# Altium PCB SpaceVNX.PcbDoc (part 1 of 2)
Units mm, origin at the board's own origin, x right, y up, seen from the top; angles counter-clockwise.
Board outline 73 x 84 mm, 6 copper layers (Top Layer, Int1 (GND), Int2 (Sign), Int3 (Sign), Int4 (PWR), Bottom Layer), stack 1.552 mm thick; 68 components, 82 nets, 1011 pads, 708 vias.
Unrouted connection lines stored in the file: 280.
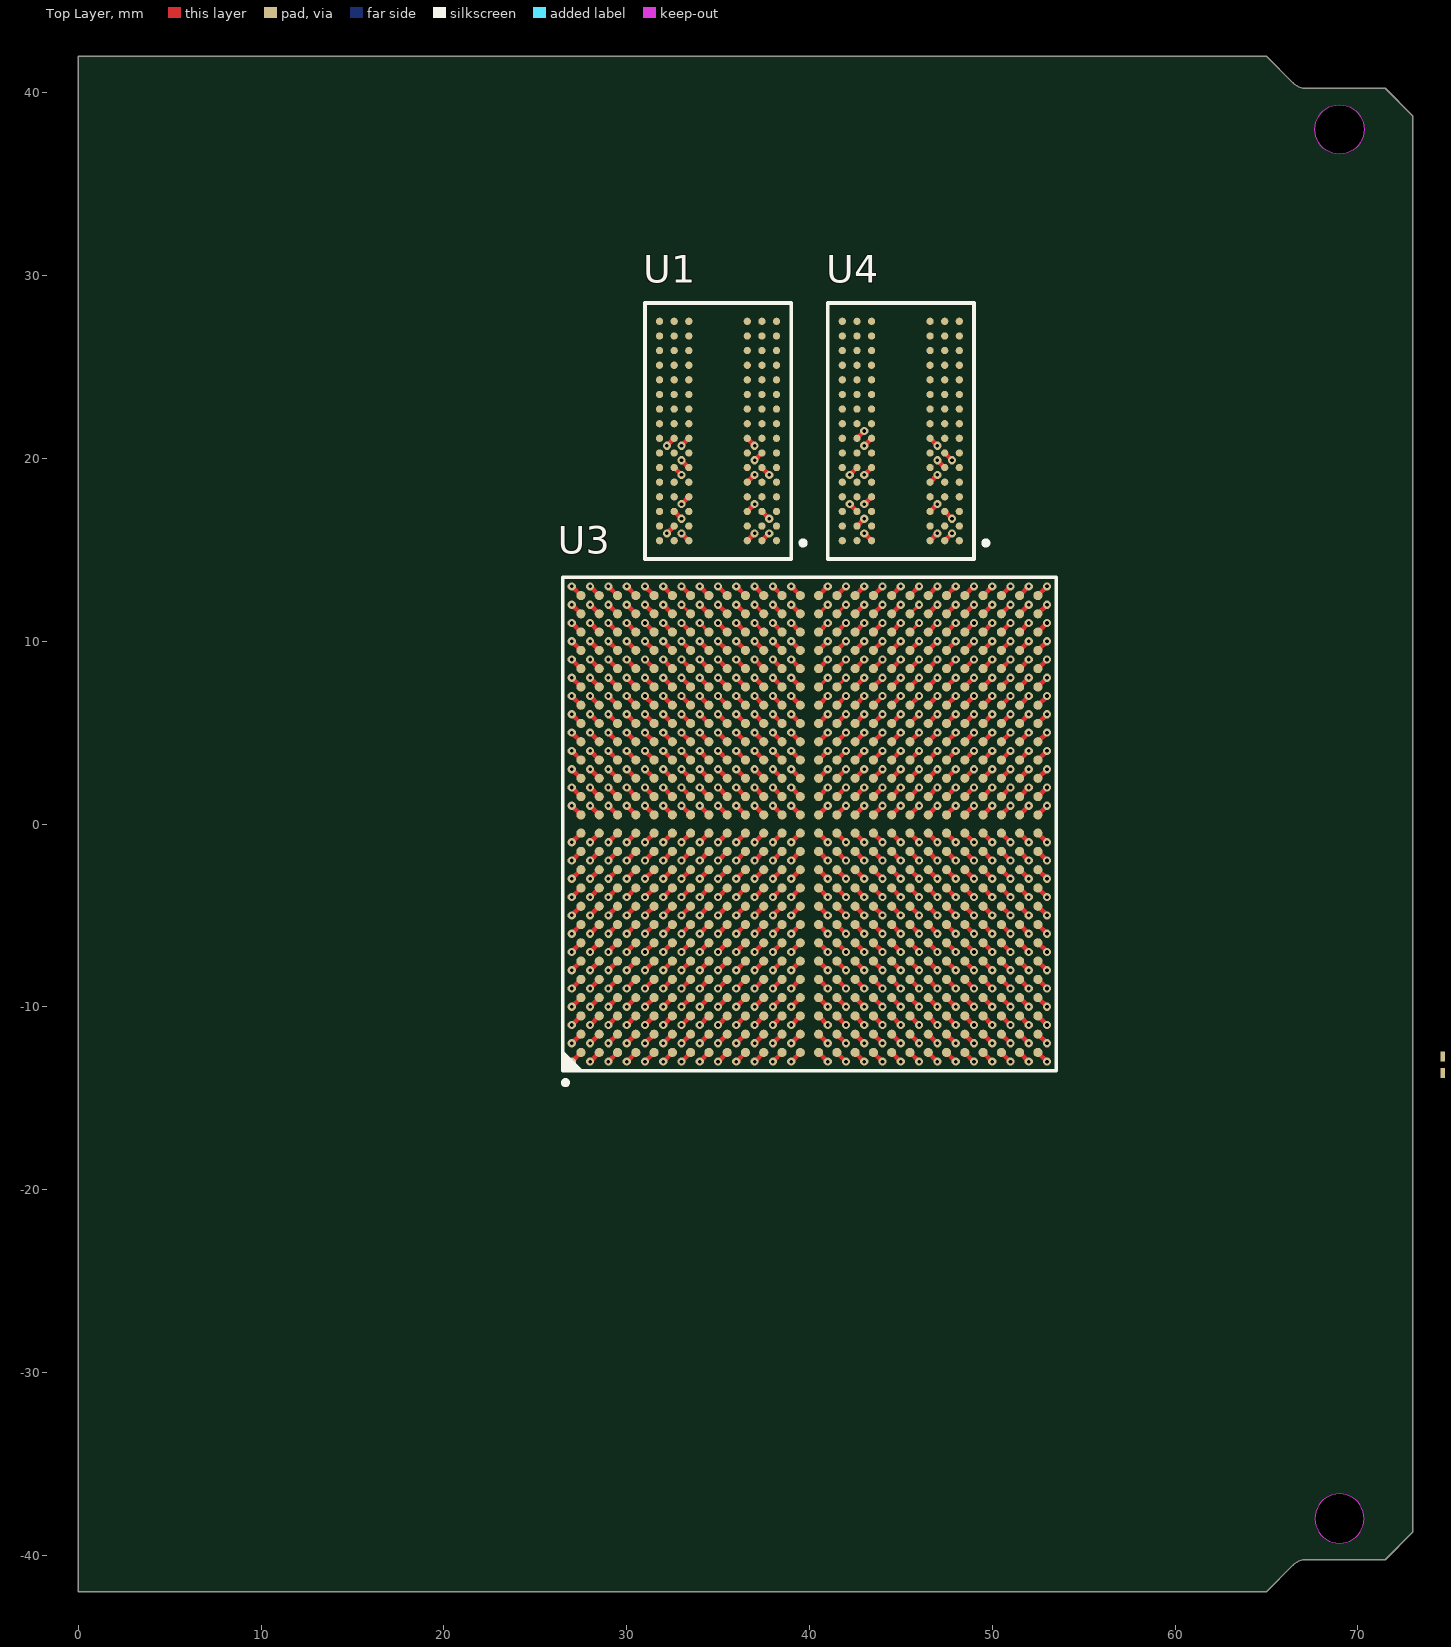
[diagram p0: Top Layer view]
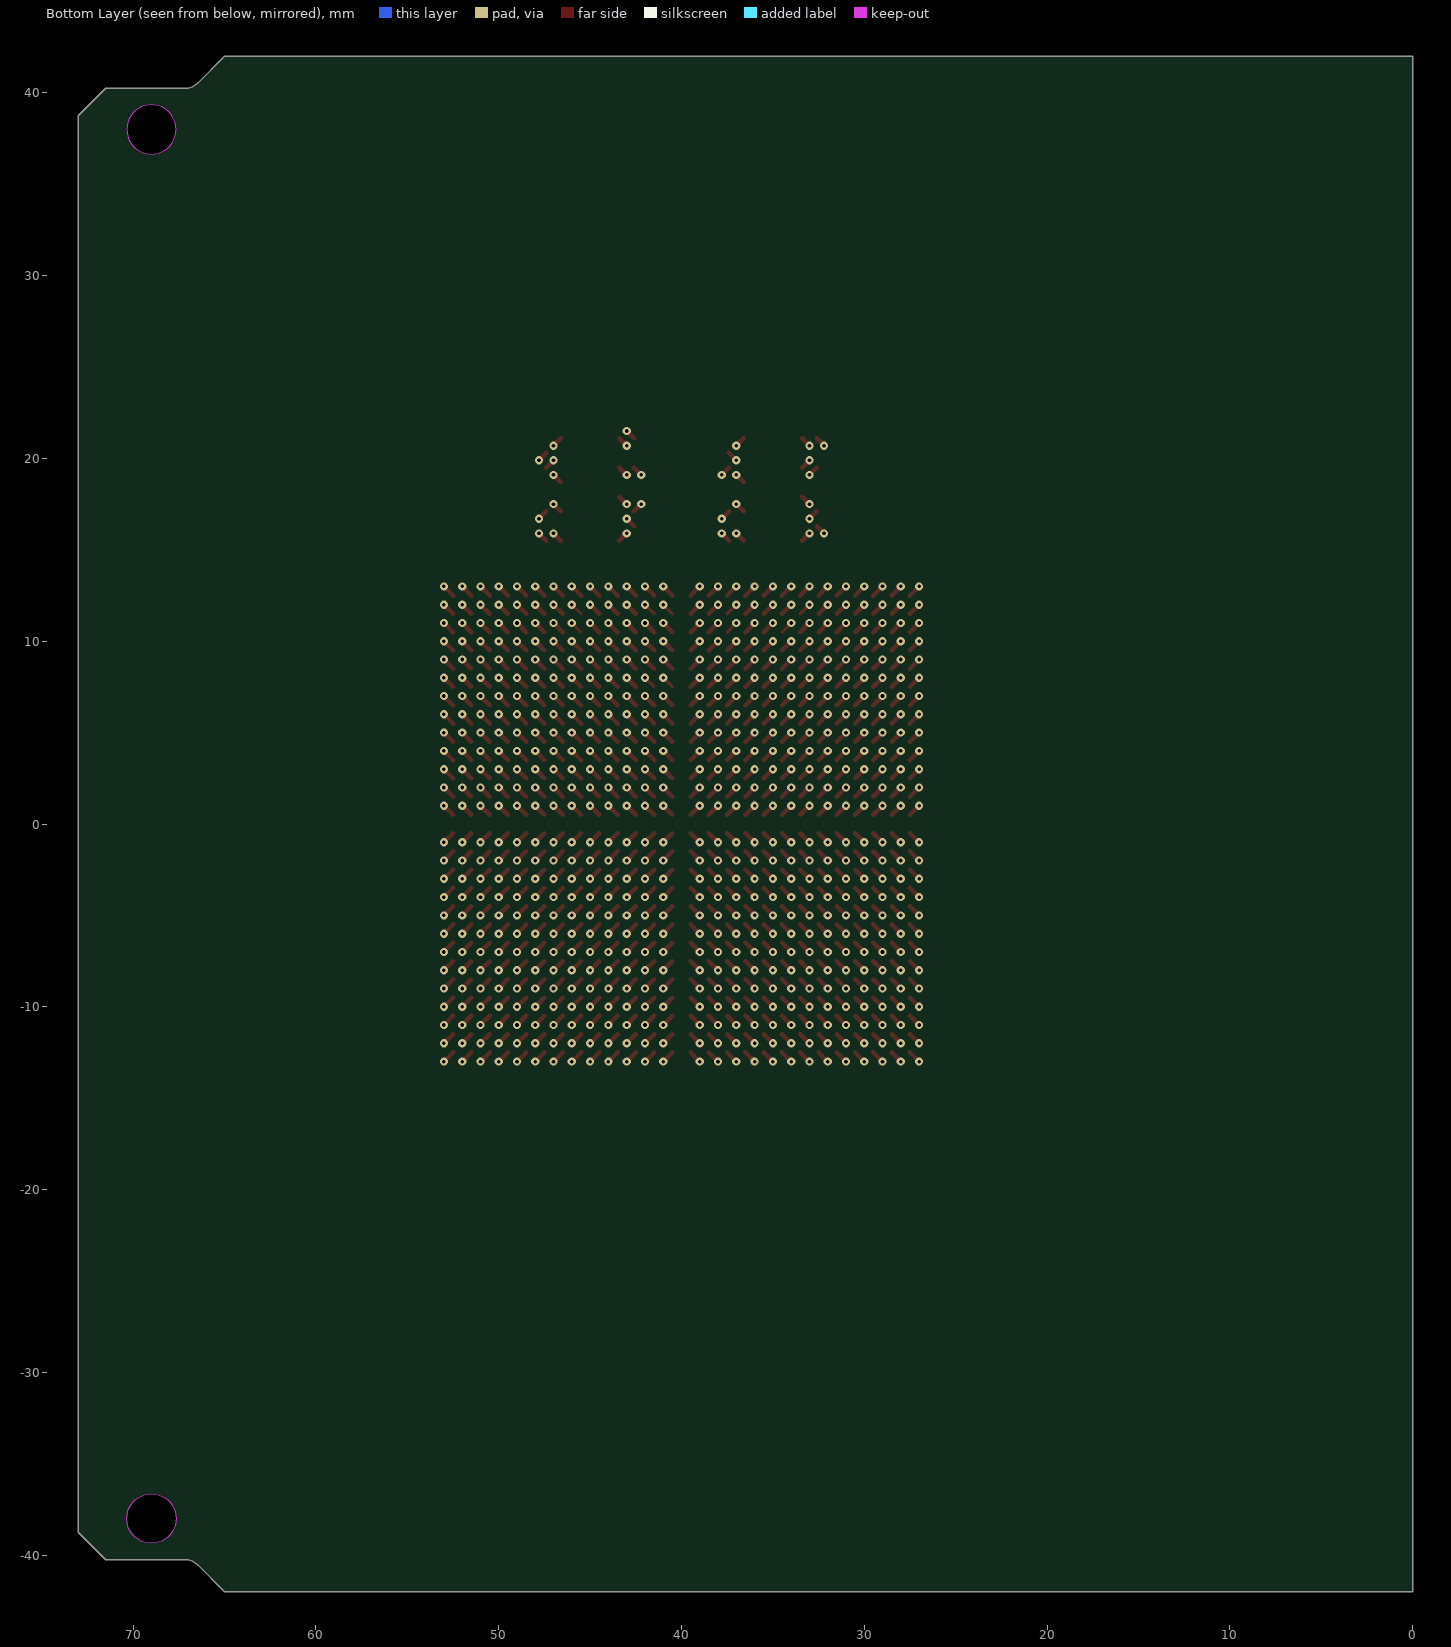
[diagram p1: Bottom Layer view, seen from below]
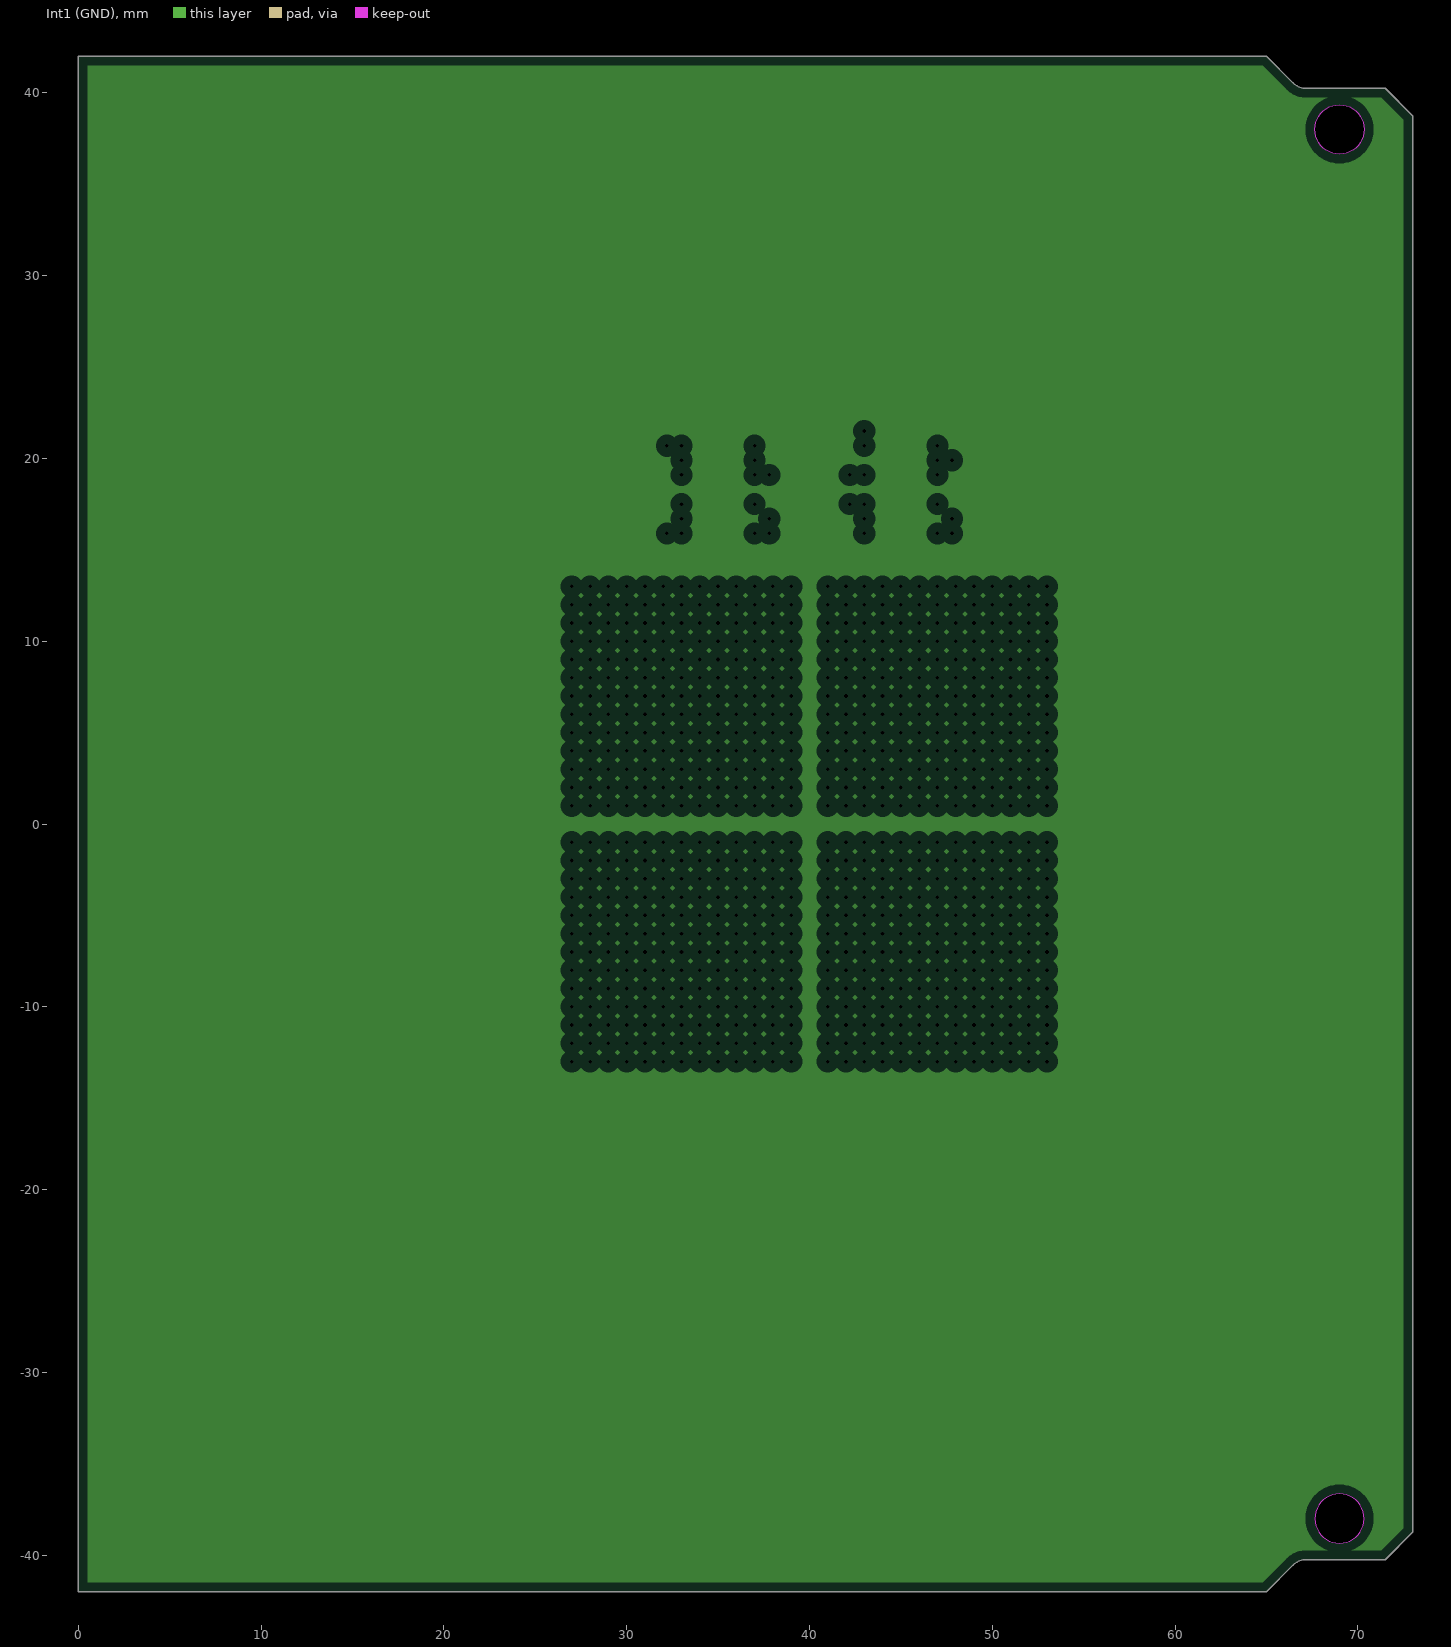
[diagram p2: Int1 (GND), clearances drawn from the general rule]
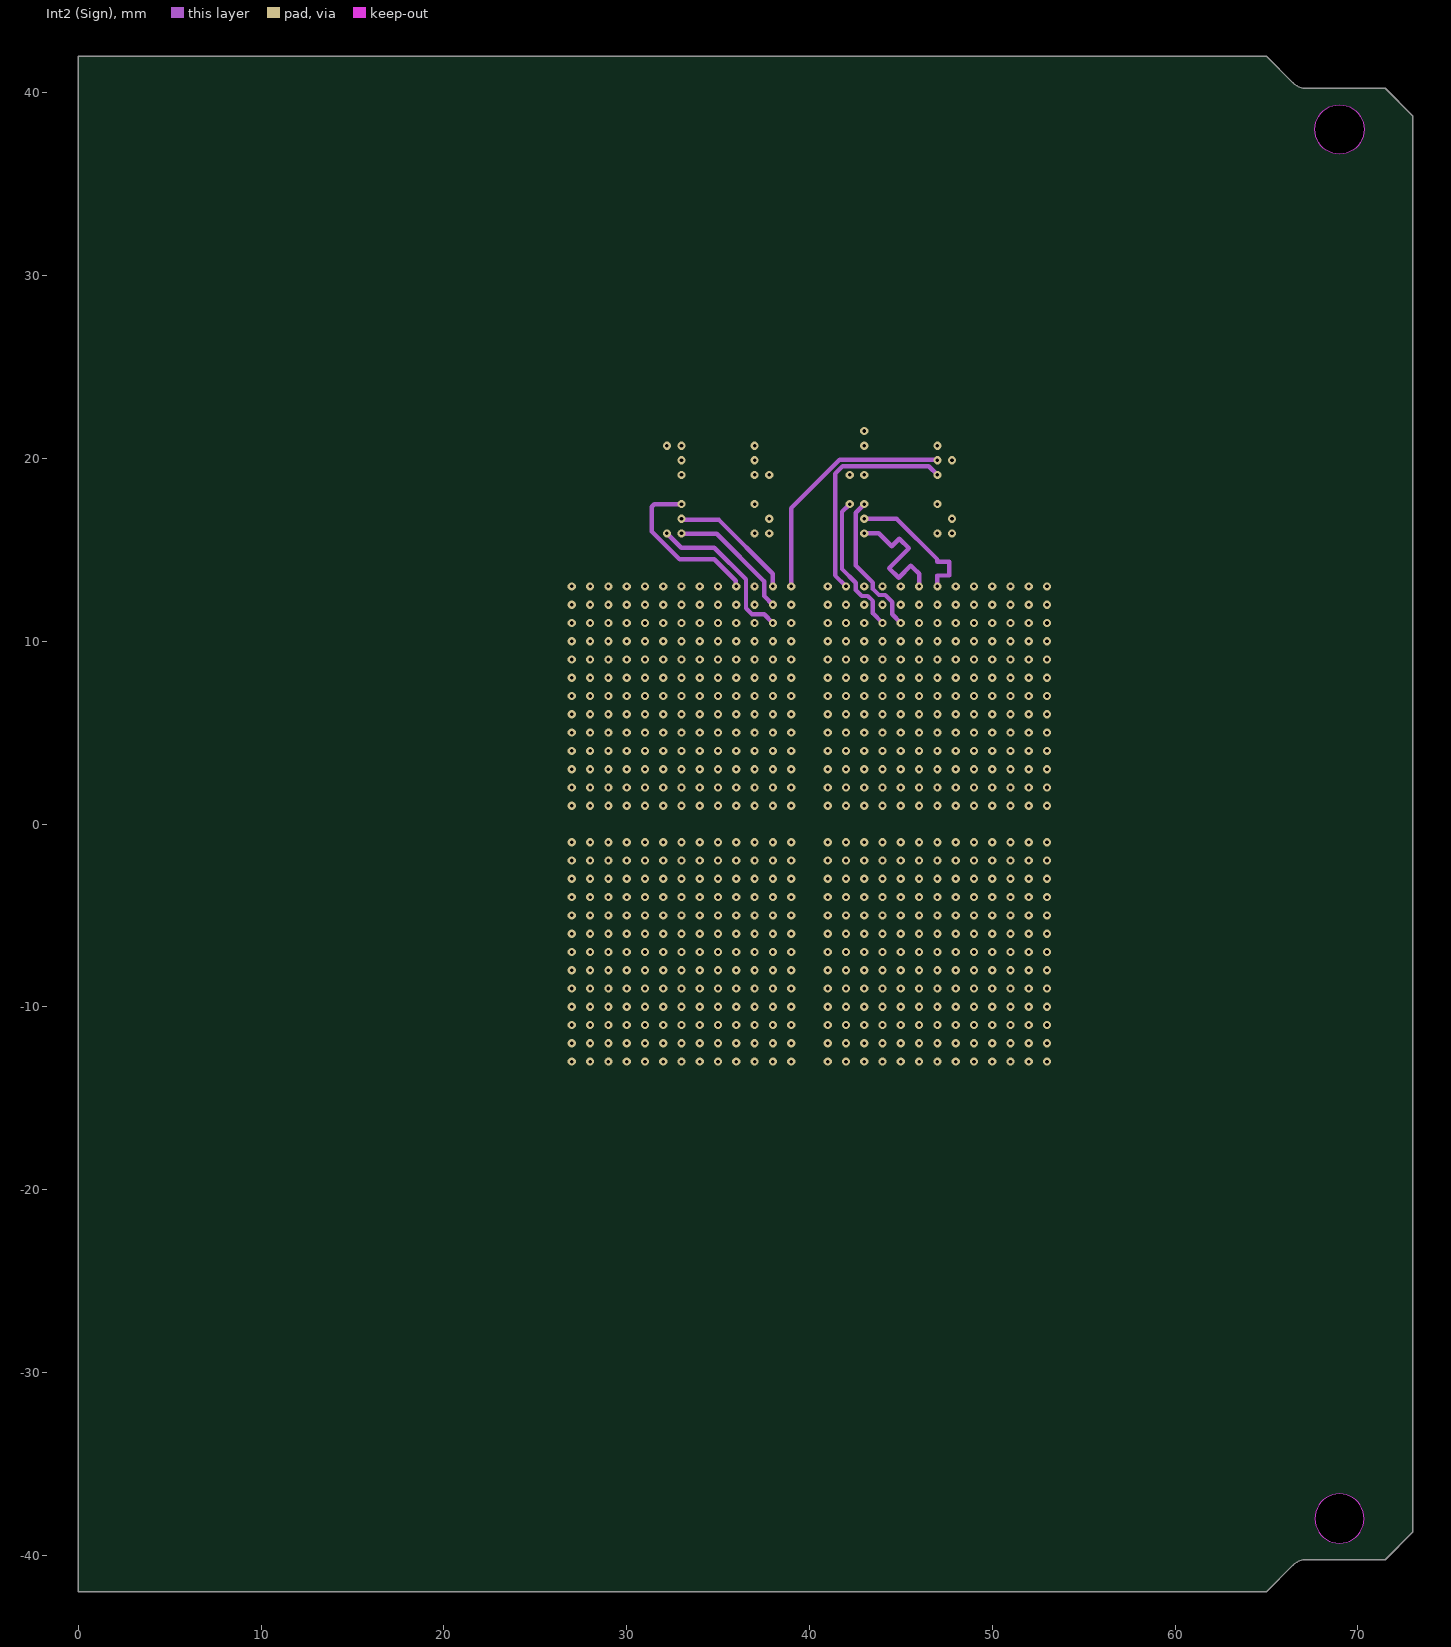
[diagram p3: Int2 (Sign)]
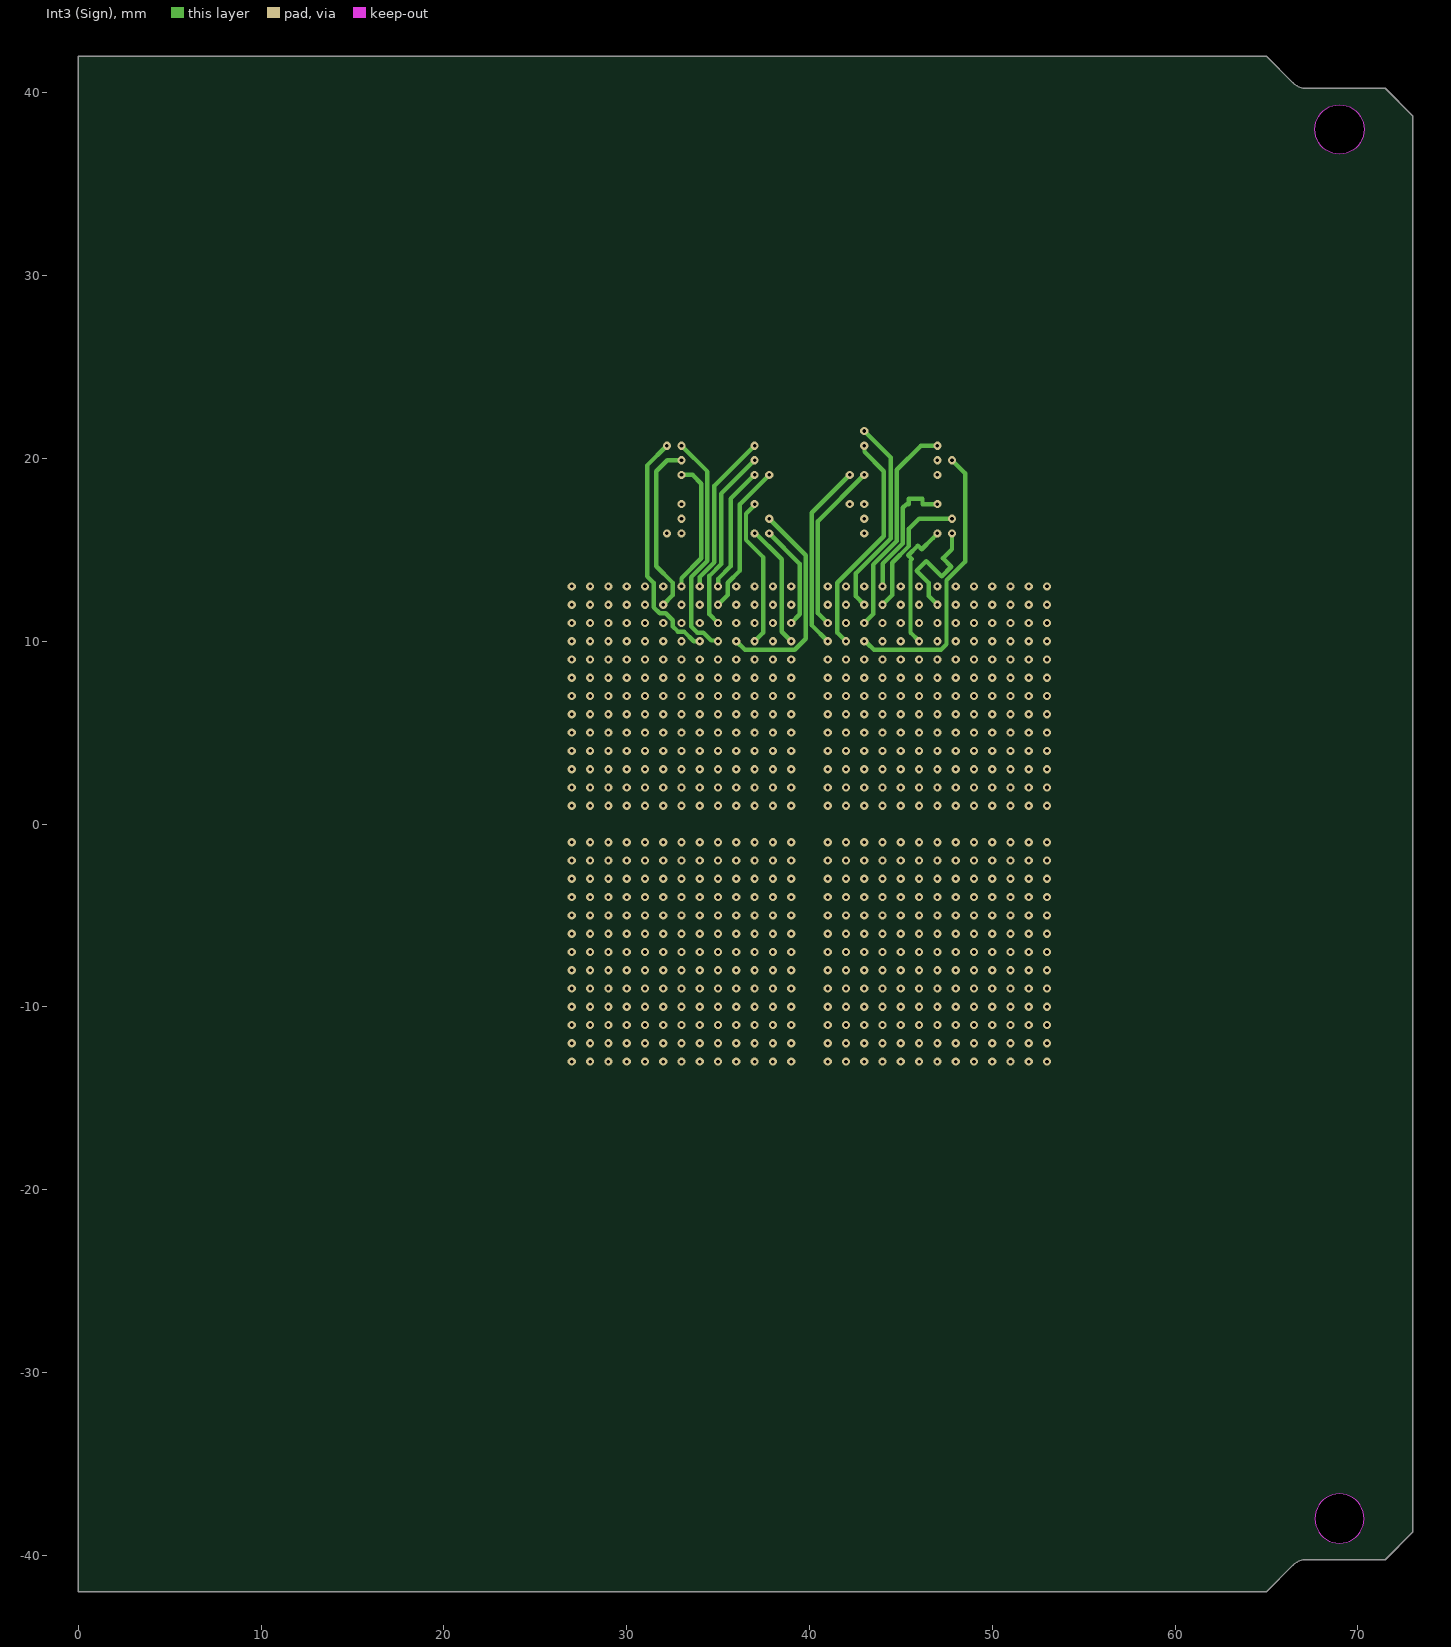
[diagram p4: Int3 (Sign)]
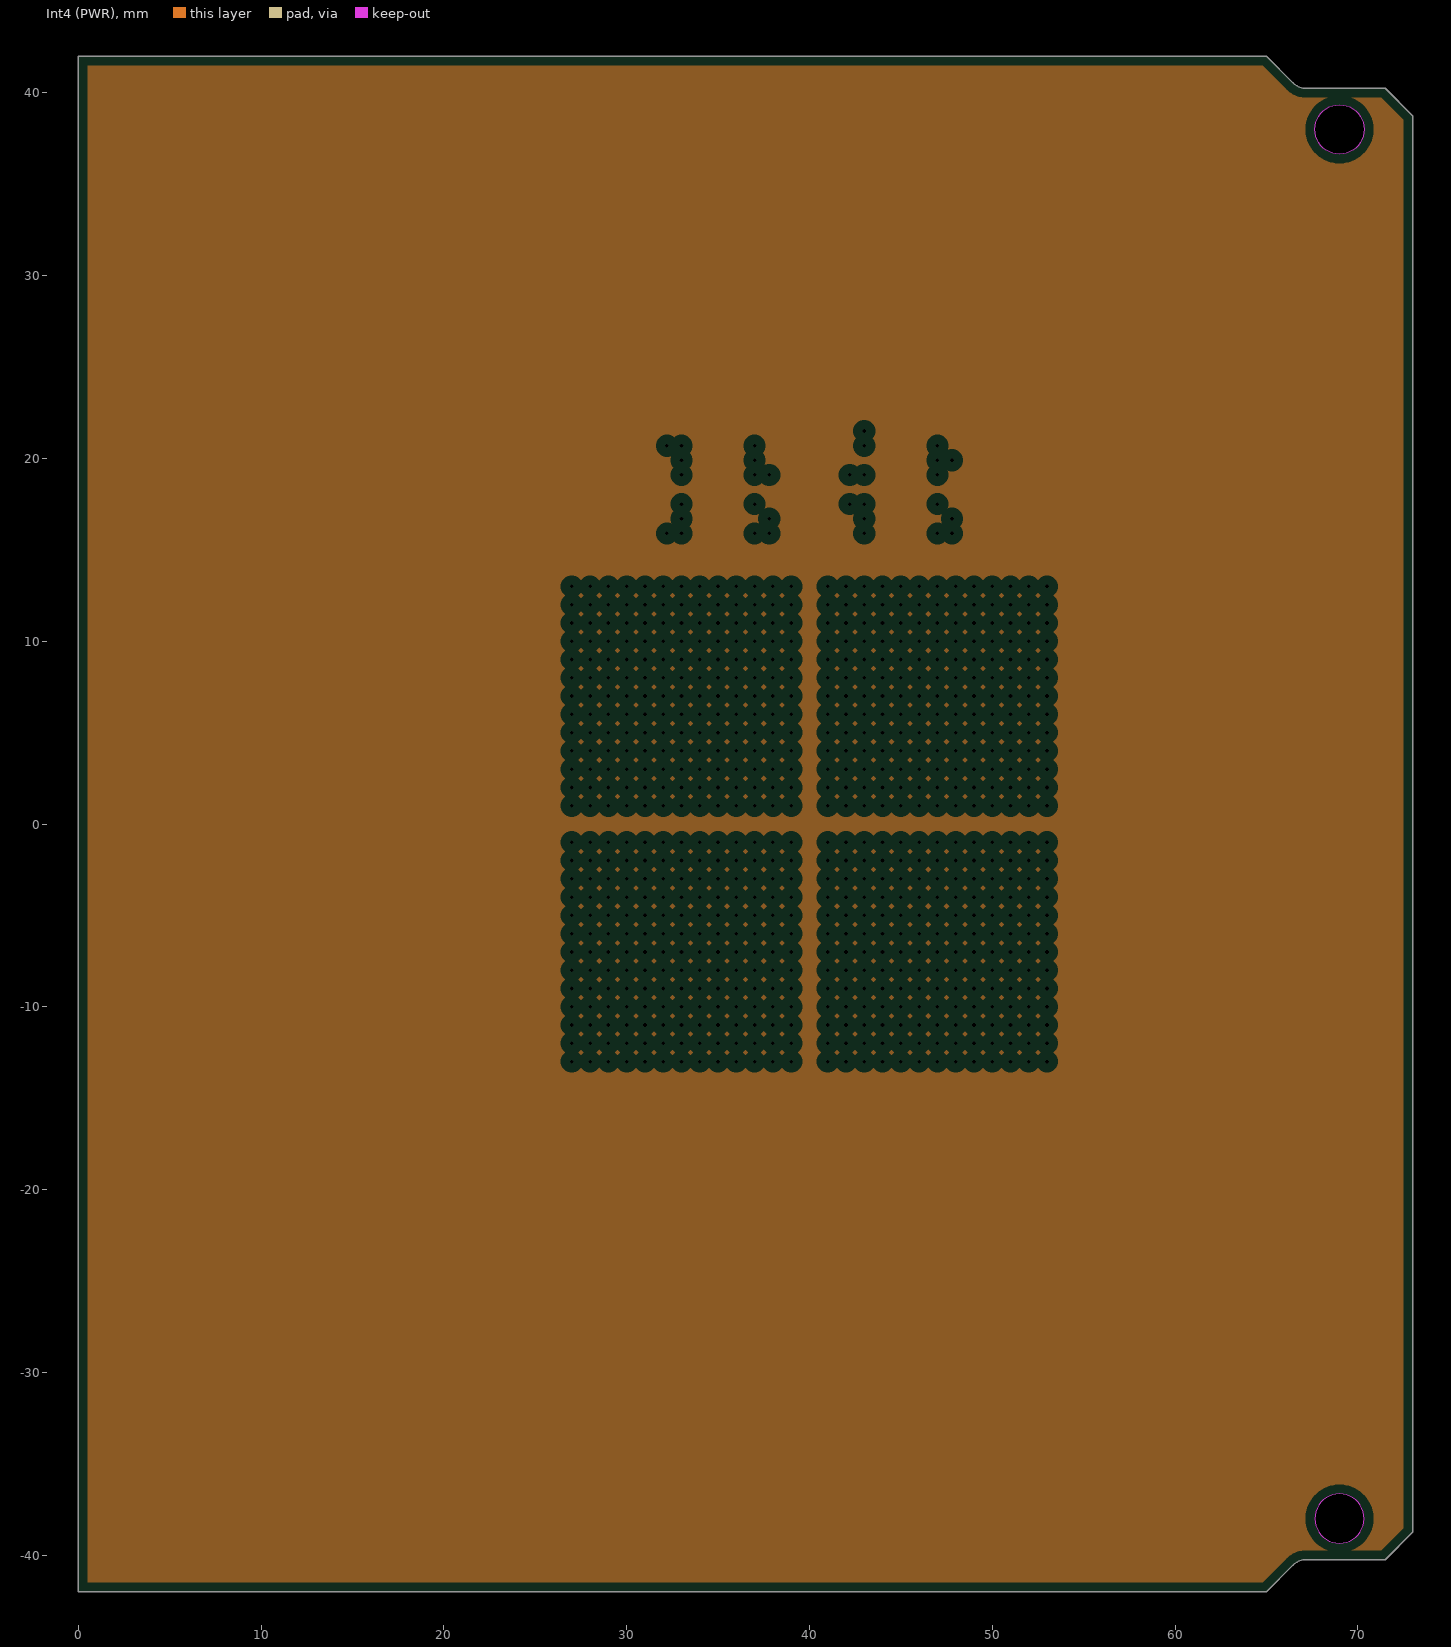
[diagram p5: Int4 (PWR), clearances drawn from the general rule]

## Layer stack, top to bottom
Top Solder: solder mask 0.0254, SM-001, Dk 4
Top Layer: signal copper 0.035
Dielectric 1: prepreg 0.1067, PP-014, Dk 4.2
Int1 (GND): plane copper 0.018
Dielectric 3: core 0.5334, Core-037, Dk 4.8
Int2 (Sign): signal copper 0.018
Dielectric 5: prepreg 0.1295, PP-017, Dk 4.3
Int3 (Sign): signal copper 0.018
Dielectric 6: core 0.5334, Core-037, Dk 4.8
Int4 (PWR): plane copper 0.018
Dielectric 8: prepreg 0.1067, PP-014, Dk 4.2
Bottom Layer: signal copper 0.035
Bottom Solder: solder mask 0.0254, SM-001, Dk 4

## Board outline
0,-42 0,42 65,42 66.457,40.543 ccw(c67.164,41.25) 67.164,40.25 71.5,40.25 73,38.75 73,-38.75 71.5,-40.25 67.164,-40.25 ccw(c67.164,-41.25) 66.457,-40.543 65,-42
cut-out: 69,36.65 cw(c69,38) 67.65,38 cw(c69,38) 69,39.35 cw(c69,38) 70.35,38 cw(c69,38)
cut-out: 67.65,-38 ccw(c69,-38) 69,-39.35 ccw(c69,-38) 70.35,-38 ccw(c69,-38) 69,-36.65 ccw(c69,-38)

## Design rules (kind name [scope] priority, off if disabled: settings)
Clearance [All] p1: gap=0.089 ignorepadtopadclearanceinfootprint=FALSE except(0.127: Arc-Via Track-Via SMDPad-Via THPad-Via Via-Via Via-Fill Via-Poly Via-Region Via-Text; 0.25: Arc-Hole Track-Hole SMDPad-Hole THPad-Hole Via-Hole Fill-Hole Poly-Hole Region-Hole Text-Hole)
DiffPairsRouting Diferential80Ohms [InDifferentialPairClass('Differential80Ohm')] p1: maxlimit=0.127 minlimit=0.127 mostfreqgap=0.127 toplayer_minwidth=0.175 toplayer_maxwidth=0.175 toplayer_prefwidth=0.175 midlayer1_minwidth=0.156 midlayer1_maxwidth=0.156 midlayer1_prefwidth=0.156 midlayer2_minwidth=0.156 midlayer2_maxwidth=0.156 midlayer2_prefwidth=0.156 bottomlayer_minwidth=0.175 bottomlayer_maxwidth=0.175 bottomlayer_prefwidth=0.175 impedanceprofiledriven=TRUE impedanceprofileid={CEFE4068-8A86-44F5-B658-EBF9CA1487B8} impedanceprofilevalue=80.000000 maxuncoupledlength=12.7
DiffPairsRouting [All] p2: maxlimit=0.254 minlimit=0.254 mostfreqgap=0.254 toplayer_minwidth=0.381 toplayer_maxwidth=0.381 toplayer_prefwidth=0.381 midlayer1_minwidth=0.381 midlayer1_maxwidth=0.381 midlayer1_prefwidth=0.381 midlayer2_minwidth=0.381 midlayer2_maxwidth=0.381 midlayer2_prefwidth=0.381 bottomlayer_minwidth=0.381 bottomlayer_maxwidth=0.381 bottomlayer_prefwidth=0.381 maxuncoupledlength=12.7
FanoutControl Fanout_BGA [IsBGA] p1: bgadir=Out bgaviamode=Centered fanoutstyle=BGA fanoutdirection=Alternating viagrid=0.025 // Fanout_BGA (Default Rule)
PlaneClearance [All] p1: clearance=0.508
PlaneConnect [All] p1: planeconnectstyle=Relief reliefexpansion=0.508 reliefentries=4 reliefconductorwidth=0.254 reliefairgap=0.254
PolygonConnect [All] p1: connectstyle=Relief reliefconductorwidth=0.254 reliefentries=4 polygonreliefangle="90 Angle" airgapwidth=0.254
RoutingVias [All] p1: holewidth=0.2 width=0.45 viastyle="Through Hole" minholewidth=0.2 minwidth=0.45 maxholewidth=6.3 maxwidth=6.55
SolderMaskExpansion [All] p1: expansion=0.102 istentingtop=FALSE
Width SingleEnded40Ohm [InNetClass('SingleEnd40Ohm')] p1: maxlimit=0.251 minlimit=0.242 preferedwidth=0.251 toplayer_minwidth=0.251 midlayer1_maxwidth=0.242 midlayer1_prefwidth=0.242 midlayer2_maxwidth=0.242 midlayer2_prefwidth=0.242 bottomlayer_minwidth=0.251 impedanceprofiledriven=TRUE impedanceprofileid={0A0E886A-F140-4D1E-BBBD-3109EA99AC6C} impedanceprofilevalue=40.000000 minimp=50.000000 maximp=50.000000 favimp=50.000000
Width [All] p2: maxlimit=0.254 minlimit=0.254 preferedwidth=0.254
26 further rules are at their usual default settings.

## Classes and differential pairs
net class PS_DDR_BYTE3: PS_DDR_DQ24 PS_DDR_DQ25 PS_DDR_DQ26 PS_DDR_DQ27 PS_DDR_DQ28 PS_DDR_DQ29 PS_DDR_DQ30 PS_DDR_DQ31
net class PS_DDR_BYTE2: PS_DDR_DQ16 PS_DDR_DQ17 PS_DDR_DQ18 PS_DDR_DQ19 PS_DDR_DQ20 PS_DDR_DQ21 PS_DDR_DQ22 PS_DDR_DQ23
net class PS_DDR_BYTE1: PS_DDR_DQ8 PS_DDR_DQ9 PS_DDR_DQ10 PS_DDR_DQ11 PS_DDR_DQ12 PS_DDR_DQ13 PS_DDR_DQ14 PS_DDR_DQ15
net class PS_DDR_BYTE0: PS_DDR_DQ0 PS_DDR_DQ1 PS_DDR_DQ2 PS_DDR_DQ3 PS_DDR_DQ4 PS_DDR_DQ5 PS_DDR_DQ6 PS_DDR_DQ7
net class PS_DDR_ADDRESS: PS_DDR_A0 PS_DDR_A1 PS_DDR_A2 PS_DDR_A3 PS_DDR_A4 PS_DDR_A5 PS_DDR_A6 PS_DDR_A7 PS_DDR_A8 PS_DDR_A9 PS_DDR_A10 PS_DDR_A11 PS_DDR_A12 PS_DDR_A13 PS_DDR_A14
differential pair class Differential80Ohm: PS_DDR_CK PS_DDR_DQS_BYTE0 PS_DDR_DQS_BYTE1 PS_DDR_DQS_BYTE2 PS_DDR_DQS_BYTE3
net class SingleEnd40Ohm: PS_DDR_A0 PS_DDR_A1 PS_DDR_A2 PS_DDR_A3 PS_DDR_A4 PS_DDR_A5 PS_DDR_A6 PS_DDR_A7 PS_DDR_A8 PS_DDR_A9 PS_DDR_A10 PS_DDR_A11 PS_DDR_A12 PS_DDR_A13 PS_DDR_A14 PS_DDR_BA0 PS_DDR_BA1 PS_DDR_BA2 PS_DDR_CAS PS_DDR_CK_N PS_DDR_CK_P PS_DDR_CKE PS_DDR_CS PS_DDR_DM_BYTE0 PS_DDR_DM_BYTE1 PS_DDR_DM_BYTE2 PS_DDR_DM_BYTE3 PS_DDR_DQ0 PS_DDR_DQ1 PS_DDR_DQ2 PS_DDR_DQ3 PS_DDR_DQ4 PS_DDR_DQ5 PS_DDR_DQ6 PS_DDR_DQ7 PS_DDR_DQ8 PS_DDR_DQ9 PS_DDR_DQ10 PS_DDR_DQ11 PS_DDR_DQ12 PS_DDR_DQ13 PS_DDR_DQ14 PS_DDR_DQ15 PS_DDR_DQ16 PS_DDR_DQ17 PS_DDR_DQ18 PS_DDR_DQ19 PS_DDR_DQ20 PS_DDR_DQ21 PS_DDR_DQ22 PS_DDR_DQ23 PS_DDR_DQ24 PS_DDR_DQ25 PS_DDR_DQ26 PS_DDR_DQ27 PS_DDR_DQ28 PS_DDR_DQ29 PS_DDR_DQ30 PS_DDR_DQ31 PS_DDR_ODT PS_DDR_RAS PS_DDR_RST PS_DDR_WE
differential pair PS_DDR_DQS_BYTE3: +PS_DDR_DQS_BYTE3_P -PS_DDR_DQS_BYTE3_N
differential pair PS_DDR_DQS_BYTE2: +PS_DDR_DQS_BYTE2_P -PS_DDR_DQS_BYTE2_N
differential pair PS_DDR_DQS_BYTE1: +PS_DDR_DQS_BYTE1_P -PS_DDR_DQS_BYTE1_N
differential pair PS_DDR_DQS_BYTE0: +PS_DDR_DQS_BYTE0_P -PS_DDR_DQS_BYTE0_N
differential pair PS_DDR_CK: +PS_DDR_CK_P -PS_DDR_CK_N

## Components (designator, comment, footprint, x,y, rotation, side; value= is the part's Value field where it differs from the comment)
C1 "100pF, 10V" WURTH_WCAP-CSGP_0402 385.439,-12.669 r0 top
C2 "4.7 µF, 6.3V" WURTH_WCAP-CSGP_0402 389.249,-12.669 r0 top
C3 "10 µF, 6.3V" WURTH_WCAP-CSGP_0402 393.567,-12.669 r0 top
C4 "10 µF, 6.3V" WURTH_WCAP-CSGP_0402 397.885,-12.669 r0 top
C5 "10 µF, 6.3V" WURTH_WCAP-CSGP_0402 402.203,-12.669 r0 top
C6 "10 µF, 6.3V" WURTH_WCAP-CSGP_0402 406.521,-12.669 r0 top
C7 "10 µF, 6.3V" WURTH_WCAP-CSGP_0402 410.839,-12.669 r0 top
C8 "100nF, 10V" WURTH_WCAP-CSGP_0402 415.157,-12.669 r0 top
C9 "100pF, 10V" WURTH_WCAP-CSGP_0402 366.897,-12.669 r0 top
C10 "100pF, 10V" WURTH_WCAP-CSGP_0402 370.707,-13.177 r90 top
C11 "4.7 µF, 6.3V" WURTH_WCAP-CSGP_0402 274.314,-13.177 r90 top
C12 "100nF, 10V" WURTH_WCAP-CSGP_0402 279.394,-13.177 r90 top
C13 "100nF, 10V" WURTH_WCAP-CSGP_0402 284.982,-13.177 r90 top
C14 "100nF, 10V" WURTH_WCAP-CSGP_0402 290.57,-13.177 r90 top
C15 "100nF, 10V" WURTH_WCAP-CSGP_0402 296.158,-13.177 r90 top
C16 "4.7 µF, 6.3V" WURTH_WCAP-CSGP_0402 301.746,-13.177 r90 top
C17 "100nF, 10V" WURTH_WCAP-CSGP_0402 307.334,-13.177 r90 top
C18 "100nF, 10V" WURTH_WCAP-CSGP_0402 313.049,-13.177 r90 top
C19 "100nF, 10V" WURTH_WCAP-CSGP_0402 318.637,-13.177 r90 top
C20 "100nF, 10V" WURTH_WCAP-CSGP_0402 324.225,-13.177 r90 top
C21 "4.7 µF, 6.3V" WURTH_WCAP-CSGP_0402 200.146,-13.177 r90 top
C22 "100nF, 10V" WURTH_WCAP-CSGP_0402 205.48,-13.177 r90 top
C23 "100nF, 10V" WURTH_WCAP-CSGP_0402 211.322,-13.177 r90 top
C24 "100nF, 10V" WURTH_WCAP-CSGP_0402 217.164,-13.177 r90 top
C25 "100nF, 10V" WURTH_WCAP-CSGP_0402 223.006,-13.177 r90 top
C26 "4.7 µF, 6.3V" WURTH_WCAP-CSGP_0402 228.848,-13.177 r90 top
C27 "100nF, 10V" WURTH_WCAP-CSGP_0402 234.69,-13.177 r90 top
C28 "100nF, 10V" WURTH_WCAP-CSGP_0402 240.532,-13.177 r90 top
C29 "100nF, 10V" WURTH_WCAP-CSGP_0402 246.374,-13.177 r90 top
C30 "100nF, 10V" WURTH_WCAP-CSGP_0402 252.216,-13.177 r90 top
C31 "100pF, 10V" WURTH_WCAP-CSGP_0402 109.341,-13.177 r90 top
C32 "100pF, 10V" WURTH_WCAP-CSGP_0402 114.675,-13.177 r90 top
R1 "10 kΩ" PANASONIC_ERJ2G_0402 419.475,-12.669 r0 top
R2 "10 kΩ" PANASONIC_ERJ2G_0402 381.121,-12.669 r0 top
R3 "240 Ω" PANASONIC_ERJ2G_0402 376.803,-12.669 r0 top
R4 "4.75 kΩ" PANASONIC_ERJ2G_0402 362.579,-12.669 r0 top
R5 "80.6 Ω" PANASONIC_ERJ2G_0402 347.72,-12.669 r0 top
R6 "80.6 Ω" PANASONIC_ERJ2G_0402 343.402,-12.669 r0 top
R7 "80.6 Ω" PANASONIC_ERJ2G_0402 339.084,-12.669 r0 top
R8 "40.2 Ω" PANASONIC_ERJ2G_0402 334.766,-12.669 r0 top
R9 "40.2 Ω" PANASONIC_ERJ2G_0402 330.448,-12.669 r0 top
R10 "40.2 Ω" PANASONIC_ERJ2G_0402 268.726,-13.177 r90 top
R11 "40.2 Ω" PANASONIC_ERJ2G_0402 263.646,-13.177 r90 top
R12 "40.2 Ω" PANASONIC_ERJ2G_0402 258.058,-13.177 r90 top
R13 "40.2 Ω" PANASONIC_ERJ2G_0402 194.558,-13.177 r90 top
R14 "40.2 Ω" PANASONIC_ERJ2G_0402 188.97,-13.177 r90 top
R15 "40.2 Ω" PANASONIC_ERJ2G_0402 183.382,-13.177 r90 top
R16 "40.2 Ω" PANASONIC_ERJ2G_0402 177.794,-13.177 r90 top
R17 "40.2 Ω" PANASONIC_ERJ2G_0402 172.206,-13.177 r90 top
R18 "240 Ω" PANASONIC_ERJ2G_0402 166.618,-13.177 r90 top
R19 "40.2 Ω" PANASONIC_ERJ2G_0402 161.03,-13.177 r90 top
R20 "40.2 Ω" PANASONIC_ERJ2G_0402 155.188,-13.177 r90 top
R21 "40.2 Ω" PANASONIC_ERJ2G_0402 149.727,-13.177 r90 top
R22 "40.2 Ω" PANASONIC_ERJ2G_0402 143.885,-13.177 r90 top
R23 "40.2 Ω" PANASONIC_ERJ2G_0402 138.043,-13.177 r90 top
R24 "40.2 Ω" PANASONIC_ERJ2G_0402 132.201,-13.177 r90 top
R25 "40.2 Ω" PANASONIC_ERJ2G_0402 126.359,-13.177 r90 top
R26 "40.2 Ω" PANASONIC_ERJ2G_0402 120.517,-13.177 r90 top
R27 "40.2 Ω" PANASONIC_ERJ2G_0402 103.499,-13.177 r90 top
R28 "40.2 Ω" PANASONIC_ERJ2G_0402 97.657,-13.177 r90 top
R29 "40.2 Ω" PANASONIC_ERJ2G_0402 91.815,-13.177 r90 top
R30 "40.2 Ω" PANASONIC_ERJ2G_0402 85.973,-13.177 r90 top
R31 "40.2 Ω" PANASONIC_ERJ2G_0402 80.639,-13.177 r90 top
R32 "40.2 Ω" PANASONIC_ERJ2G_0402 74.797,-13.177 r90 top
U1 "MT41K256M16TW-107-P" Micron_TW 35,21.5 r180 top
U2 "TPS51200DRCT" TEXAS_VSON10 435.477,-14.193 r0 top
U3 "XC7Z030-1FBG676C" XILINX_FBG676 40,0 r90 top
U4 "MT41K256M16TW-107-P" Micron_TW 45,21.5 r180 top

## Footprints (in the part's own frame and the unit in brackets; to place one, negate y for a bottom-side part, rotate by r counter-clockwise, add the part's x,y. Pads: shape width x height; smd on the part's side, far side on the other; paste and mask are expansions set on the pad)
Micron_TW [mm] "96 Ball 8mm x 14 mm"
  round 0.399 smd paste+0 mask+0: A1(-3.2,6) A2(-2.4,6) A3(-1.6,6) A7(1.6,6) A8(2.4,6) A9(3.2,6) B1(-3.2,5.2) B2(-2.4,5.2) B3(-1.6,5.2) B7(1.6,5.2) B8(2.4,5.2) B9(3.2,5.2) C1(-3.2,4.4) C2(-2.4,4.4) C3(-1.6,4.4) C7(1.6,4.4) C8(2.4,4.4) C9(3.2,4.4) D1(-3.2,3.6) D2(-2.4,3.6) D3(-1.6,3.6) D7(1.6,3.6) D8(2.4,3.6) D9(3.2,3.6) E1(-3.2,2.8) E2(-2.4,2.8) E3(-1.6,2.8) E7(1.6,2.8) E8(2.4,2.8) E9(3.2,2.8) F1(-3.2,2) F2(-2.4,2) F3(-1.6,2) F7(1.6,2) F8(2.4,2) F9(3.2,2) G1(-3.2,1.2) G2(-2.4,1.2) G3(-1.6,1.2) G7(1.6,1.2) G8(2.4,1.2) G9(3.2,1.2) H1(-3.2,0.4) H2(-2.4,0.4) H3(-1.6,0.4) H7(1.6,0.4) H8(2.4,0.4) H9(3.2,0.4) J1(-3.2,-0.4) J2(-2.4,-0.4) J3(-1.6,-0.4) J7(1.6,-0.4) J8(2.4,-0.4) J9(3.2,-0.4) K1(-3.2,-1.2) K2(-2.4,-1.2) K3(-1.6,-1.2) K7(1.6,-1.2) K8(2.4,-1.2) K9(3.2,-1.2) L1(-3.2,-2) L2(-2.4,-2) L3(-1.6,-2) L7(1.6,-2) L8(2.4,-2) L9(3.2,-2) M1(-3.2,-2.8) M2(-2.4,-2.8) M3(-1.6,-2.8) M7(1.6,-2.8) M8(2.4,-2.8) M9(3.2,-2.8) N1(-3.2,-3.6) N2(-2.4,-3.6) N3(-1.6,-3.6) N7(1.6,-3.6) N8(2.4,-3.6) N9(3.2,-3.6) P1(-3.2,-4.4) P2(-2.4,-4.4) P3(-1.6,-4.4) P7(1.6,-4.4) P8(2.4,-4.4) P9(3.2,-4.4) R1(-3.2,-5.2) R2(-2.4,-5.2) R3(-1.6,-5.2) R7(1.6,-5.2) R8(2.4,-5.2) R9(3.2,-5.2) T1(-3.2,-6) T2(-2.4,-6) T3(-1.6,-6) T7(1.6,-6) T8(2.4,-6) T9(3.2,-6)
  silkscreen extent -4.78,-7 4,7, body extent -4.25,-7.25 4.25,7.25, height 0.25
PANASONIC_ERJ2G_0402 [mm] "Chip Resistor, 2-Leads, Body 1,00x0,50mm, IPC Medium Density"
  rect 0.55x0.55 smd: 1(-0.45,0) 2(0.45,0)
  body extent -0.5,-0.25 0.5,0.25, height 0.36
TEXAS_VSON10 [mm] "DRC, 3x3mm Body, 0.5 mm Pitch, Plastic Small Outline"
  rrect25% 0.6x0.24 smd mask+0: 1(-1.4,1) 2(-1.4,0.5) 3(-1.4,0) 4(-1.4,-0.5) 5(-1.4,-1) 6(1.4,-1) 7(1.4,-0.5) 8(1.4,0) 9(1.4,0.5) 10(1.4,1)
  rrect5% 1.65x2.4 smd paste-2 mask+0: 11(0,0)
  round 0.3 hole 0.2 mask+0: 12(0,-0.95) 13(-0.575,0) 14(0.575,0) 15(0,0.95)
  Top Layer region: 0.375,1.2 0.825,1.2 0.825,-1.2 0.375,-1.2 0.375,-1.7 0.125,-1.7 0.125,-1.2 -0.125,-1.2 -0.125,-1.7 -0.375,-1.7 -0.375,-1.2 -0.825,-1.2 -0.825,1.2 -0.375,1.2 -0.375,1.7 -0.125,1.7 -0.125,1.2 0.125,1.2 0.125,1.7 0.375,1.7
  silkscreen extent -2.49,-1.5 1.5,1.5, body extent -1.5,-1.5 1.5,1.5, height 1
WURTH_WCAP-CSGP_0402 [mm] "Ceramic Capacitors, body 1x0.5mm"
  rect 0.5x0.5 smd: 1(-0.5,0) 2(0.5,0)
  body extent -0.5,-0.25 0.5,0.25, height 0.5
XILINX_FBG676 [mm] "BGA, 676-Balls, Body 27x27mm, Pitch 1.0mm"
  round 0.5 smd: A1(-12.5,12.5) A2(-11.5,12.5) A3(-10.5,12.5) A4(-9.5,12.5) A5(-8.5,12.5) A6(-7.5,12.5) A7(-6.5,12.5) A8(-5.5,12.5) A9(-4.5,12.5) A10(-3.5,12.5) A11(-2.5,12.5) A12(-1.5,12.5) A13(-0.5,12.5) A14(0.5,12.5) A15(1.5,12.5) A16(2.5,12.5) A17(3.5,12.5) A18(4.5,12.5) A19(5.5,12.5) A20(6.5,12.5) A21(7.5,12.5) A22(8.5,12.5) A23(9.5,12.5) A24(10.5,12.5) A25(11.5,12.5) A26(12.5,12.5) AA1(-12.5,-7.5) AA2(-11.5,-7.5) AA3(-10.5,-7.5) AA4(-9.5,-7.5) AA5(-8.5,-7.5) AA6(-7.5,-7.5) AA7(-6.5,-7.5) AA8(-5.5,-7.5) AA9(-4.5,-7.5) AA10(-3.5,-7.5) AA11(-2.5,-7.5) AA12(-1.5,-7.5) AA13(-0.5,-7.5) AA14(0.5,-7.5) AA15(1.5,-7.5) AA16(2.5,-7.5) AA17(3.5,-7.5) AA18(4.5,-7.5) AA19(5.5,-7.5) AA20(6.5,-7.5) AA21(7.5,-7.5) AA22(8.5,-7.5) AA23(9.5,-7.5) AA24(10.5,-7.5) AA25(11.5,-7.5) AA26(12.5,-7.5) AB1(-12.5,-8.5) AB2(-11.5,-8.5) AB3(-10.5,-8.5) AB4(-9.5,-8.5) AB5(-8.5,-8.5) AB6(-7.5,-8.5) AB7(-6.5,-8.5) AB8(-5.5,-8.5) AB9(-4.5,-8.5) AB10(-3.5,-8.5) AB11(-2.5,-8.5) AB12(-1.5,-8.5) AB13(-0.5,-8.5) AB14(0.5,-8.5) AB15(1.5,-8.5) AB16(2.5,-8.5) AB17(3.5,-8.5) AB18(4.5,-8.5) AB19(5.5,-8.5) AB20(6.5,-8.5) AB21(7.5,-8.5) AB22(8.5,-8.5) AB23(9.5,-8.5) AB24(10.5,-8.5) AB25(11.5,-8.5) AB26(12.5,-8.5) AC1(-12.5,-9.5) AC2(-11.5,-9.5) AC3(-10.5,-9.5) AC4(-9.5,-9.5) AC5(-8.5,-9.5) AC6(-7.5,-9.5) AC7(-6.5,-9.5) AC8(-5.5,-9.5) AC9(-4.5,-9.5) AC10(-3.5,-9.5) AC11(-2.5,-9.5) AC12(-1.5,-9.5) AC13(-0.5,-9.5) AC14(0.5,-9.5) AC15(1.5,-9.5) AC16(2.5,-9.5) AC17(3.5,-9.5) AC18(4.5,-9.5) AC19(5.5,-9.5) AC20(6.5,-9.5) AC21(7.5,-9.5) AC22(8.5,-9.5) AC23(9.5,-9.5) AC24(10.5,-9.5) AC25(11.5,-9.5) AC26(12.5,-9.5) AD1(-12.5,-10.5) AD2(-11.5,-10.5) AD3(-10.5,-10.5) AD4(-9.5,-10.5) AD5(-8.5,-10.5) AD6(-7.5,-10.5) AD7(-6.5,-10.5) AD8(-5.5,-10.5) AD9(-4.5,-10.5) AD10(-3.5,-10.5) AD11(-2.5,-10.5) AD12(-1.5,-10.5) AD13(-0.5,-10.5) AD14(0.5,-10.5) AD15(1.5,-10.5) AD16(2.5,-10.5) AD17(3.5,-10.5) AD18(4.5,-10.5) AD19(5.5,-10.5) AD20(6.5,-10.5) AD21(7.5,-10.5) AD22(8.5,-10.5) AD23(9.5,-10.5) AD24(10.5,-10.5) AD25(11.5,-10.5) AD26(12.5,-10.5) AE1(-12.5,-11.5) AE2(-11.5,-11.5) AE3(-10.5,-11.5) AE4(-9.5,-11.5) AE5(-8.5,-11.5) AE6(-7.5,-11.5) AE7(-6.5,-11.5) AE8(-5.5,-11.5) AE9(-4.5,-11.5) AE10(-3.5,-11.5) AE11(-2.5,-11.5) AE12(-1.5,-11.5) AE13(-0.5,-11.5) AE14(0.5,-11.5) AE15(1.5,-11.5) AE16(2.5,-11.5) AE17(3.5,-11.5) AE18(4.5,-11.5) AE19(5.5,-11.5) AE20(6.5,-11.5) AE21(7.5,-11.5) AE22(8.5,-11.5) AE23(9.5,-11.5) AE24(10.5,-11.5) AE25(11.5,-11.5) AE26(12.5,-11.5) AF1(-12.5,-12.5) AF2(-11.5,-12.5) AF3(-10.5,-12.5) AF4(-9.5,-12.5) AF5(-8.5,-12.5) AF6(-7.5,-12.5) AF7(-6.5,-12.5) AF8(-5.5,-12.5) AF9(-4.5,-12.5) AF10(-3.5,-12.5) AF11(-2.5,-12.5) AF12(-1.5,-12.5) AF13(-0.5,-12.5) AF14(0.5,-12.5) AF15(1.5,-12.5) AF16(2.5,-12.5) AF17(3.5,-12.5) AF18(4.5,-12.5) AF19(5.5,-12.5) AF20(6.5,-12.5) AF21(7.5,-12.5) AF22(8.5,-12.5) AF23(9.5,-12.5) AF24(10.5,-12.5) AF25(11.5,-12.5) AF26(12.5,-12.5) B1(-12.5,11.5) B2(-11.5,11.5) B3(-10.5,11.5) B4(-9.5,11.5) B5(-8.5,11.5) B6(-7.5,11.5) B7(-6.5,11.5) B8(-5.5,11.5) B9(-4.5,11.5) B10(-3.5,11.5) B11(-2.5,11.5) B12(-1.5,11.5) B13(-0.5,11.5) B14(0.5,11.5) B15(1.5,11.5) B16(2.5,11.5) B17(3.5,11.5) B18(4.5,11.5) B19(5.5,11.5) B20(6.5,11.5) B21(7.5,11.5) B22(8.5,11.5) B23(9.5,11.5) B24(10.5,11.5) B25(11.5,11.5) B26(12.5,11.5) C1(-12.5,10.5) C2(-11.5,10.5) C3(-10.5,10.5) C4(-9.5,10.5) C5(-8.5,10.5) C6(-7.5,10.5) C7(-6.5,10.5) C8(-5.5,10.5) C9(-4.5,10.5) C10(-3.5,10.5) C11(-2.5,10.5) C12(-1.5,10.5) C13(-0.5,10.5) C14(0.5,10.5) C15(1.5,10.5) C16(2.5,10.5) C17(3.5,10.5) C18(4.5,10.5) C19(5.5,10.5) C20(6.5,10.5) C21(7.5,10.5) C22(8.5,10.5) C23(9.5,10.5) C24(10.5,10.5) C25(11.5,10.5) C26(12.5,10.5) D1(-12.5,9.5) D2(-11.5,9.5) D3(-10.5,9.5) D4(-9.5,9.5) D5(-8.5,9.5) D6(-7.5,9.5) D7(-6.5,9.5) D8(-5.5,9.5) D9(-4.5,9.5) D10(-3.5,9.5) D11(-2.5,9.5) D12(-1.5,9.5) D13(-0.5,9.5) D14(0.5,9.5) D15(1.5,9.5) D16(2.5,9.5) D17(3.5,9.5) D18(4.5,9.5) D19(5.5,9.5) D20(6.5,9.5) D21(7.5,9.5) D22(8.5,9.5) D23(9.5,9.5) D24(10.5,9.5) D25(11.5,9.5) D26(12.5,9.5) E1(-12.5,8.5) E2(-11.5,8.5) E3(-10.5,8.5) E4(-9.5,8.5) E5(-8.5,8.5) E6(-7.5,8.5) E7(-6.5,8.5) E8(-5.5,8.5) E9(-4.5,8.5) E10(-3.5,8.5) E11(-2.5,8.5) E12(-1.5,8.5) E13(-0.5,8.5) E14(0.5,8.5) E15(1.5,8.5) E16(2.5,8.5) E17(3.5,8.5) E18(4.5,8.5) E19(5.5,8.5) E20(6.5,8.5) E21(7.5,8.5) E22(8.5,8.5) E23(9.5,8.5) E24(10.5,8.5) E25(11.5,8.5) E26(12.5,8.5) F1(-12.5,7.5) F2(-11.5,7.5) F3(-10.5,7.5) F4(-9.5,7.5) F5(-8.5,7.5) F6(-7.5,7.5) F7(-6.5,7.5) F8(-5.5,7.5) F9(-4.5,7.5) F10(-3.5,7.5) F11(-2.5,7.5) F12(-1.5,7.5) F13(-0.5,7.5) F14(0.5,7.5) F15(1.5,7.5) F16(2.5,7.5) F17(3.5,7.5) F18(4.5,7.5) F19(5.5,7.5) F20(6.5,7.5) F21(7.5,7.5) F22(8.5,7.5) F23(9.5,7.5) F24(10.5,7.5) F25(11.5,7.5) F26(12.5,7.5) G1(-12.5,6.5) G2(-11.5,6.5) G3(-10.5,6.5) G4(-9.5,6.5) G5(-8.5,6.5) G6(-7.5,6.5) G7(-6.5,6.5) G8(-5.5,6.5) G9(-4.5,6.5) G10(-3.5,6.5) G11(-2.5,6.5) G12(-1.5,6.5) G13(-0.5,6.5) G14(0.5,6.5) G15(1.5,6.5) G16(2.5,6.5) G17(3.5,6.5) G18(4.5,6.5) G19(5.5,6.5) G20(6.5,6.5) G21(7.5,6.5) G22(8.5,6.5) G23(9.5,6.5) G24(10.5,6.5) G25(11.5,6.5) G26(12.5,6.5) H1(-12.5,5.5) H2(-11.5,5.5) H3(-10.5,5.5) H4(-9.5,5.5) H5(-8.5,5.5) H6(-7.5,5.5) H7(-6.5,5.5) H8(-5.5,5.5) H9(-4.5,5.5) H10(-3.5,5.5) H11(-2.5,5.5) H12(-1.5,5.5) H13(-0.5,5.5) H14(0.5,5.5) H15(1.5,5.5) H16(2.5,5.5) H17(3.5,5.5) H18(4.5,5.5) H19(5.5,5.5) H20(6.5,5.5) H21(7.5,5.5) H22(8.5,5.5) H23(9.5,5.5) H24(10.5,5.5) H25(11.5,5.5) H26(12.5,5.5) J1(-12.5,4.5) J2(-11.5,4.5) J3(-10.5,4.5) J4(-9.5,4.5) J5(-8.5,4.5) J6(-7.5,4.5) J7(-6.5,4.5) J8(-5.5,4.5) J9(-4.5,4.5) J10(-3.5,4.5) J11(-2.5,4.5) J12(-1.5,4.5) J13(-0.5,4.5) J14(0.5,4.5) J15(1.5,4.5) J16(2.5,4.5) J17(3.5,4.5) J18(4.5,4.5) J19(5.5,4.5) J20(6.5,4.5) J21(7.5,4.5) J22(8.5,4.5) J23(9.5,4.5) J24(10.5,4.5) J25(11.5,4.5) J26(12.5,4.5) K1(-12.5,3.5) K2(-11.5,3.5) K3(-10.5,3.5) K4(-9.5,3.5) K5(-8.5,3.5) K6(-7.5,3.5) K7(-6.5,3.5) K8(-5.5,3.5) K9(-4.5,3.5) K10(-3.5,3.5) K11(-2.5,3.5) K12(-1.5,3.5) K13(-0.5,3.5) K14(0.5,3.5) K15(1.5,3.5) K16(2.5,3.5) K17(3.5,3.5) K18(4.5,3.5) K19(5.5,3.5) K20(6.5,3.5) K21(7.5,3.5) K22(8.5,3.5) K23(9.5,3.5) K24(10.5,3.5) K25(11.5,3.5) K26(12.5,3.5) L1(-12.5,2.5) L2(-11.5,2.5) L3(-10.5,2.5) L4(-9.5,2.5) L5(-8.5,2.5) L6(-7.5,2.5) L7(-6.5,2.5) L8(-5.5,2.5) L9(-4.5,2.5) L10(-3.5,2.5) L11(-2.5,2.5) L12(-1.5,2.5) L13(-0.5,2.5) L14(0.5,2.5) L15(1.5,2.5) L16(2.5,2.5) L17(3.5,2.5) L18(4.5,2.5) L19(5.5,2.5) L20(6.5,2.5) L21(7.5,2.5) L22(8.5,2.5) L23(9.5,2.5) L24(10.5,2.5) L25(11.5,2.5) L26(12.5,2.5) M1(-12.5,1.5) M2(-11.5,1.5) M3(-10.5,1.5) M4(-9.5,1.5) M5(-8.5,1.5) M6(-7.5,1.5) M7(-6.5,1.5) M8(-5.5,1.5) M9(-4.5,1.5) M10(-3.5,1.5) M11(-2.5,1.5) M12(-1.5,1.5) M13(-0.5,1.5) M14(0.5,1.5) M15(1.5,1.5) M16(2.5,1.5) M17(3.5,1.5) M18(4.5,1.5) M19(5.5,1.5) M20(6.5,1.5) M21(7.5,1.5) M22(8.5,1.5) M23(9.5,1.5) M24(10.5,1.5) M25(11.5,1.5) M26(12.5,1.5) N1(-12.5,0.5) N2(-11.5,0.5) N3(-10.5,0.5) N4(-9.5,0.5) N5(-8.5,0.5) N6(-7.5,0.5) N7(-6.5,0.5) N8(-5.5,0.5) N9(-4.5,0.5) N10(-3.5,0.5) N11(-2.5,0.5) N12(-1.5,0.5) N13(-0.5,0.5) N14(0.5,0.5) N15(1.5,0.5) N16(2.5,0.5) N17(3.5,0.5) N18(4.5,0.5) N19(5.5,0.5) N20(6.5,0.5) N21(7.5,0.5) N22(8.5,0.5) N23(9.5,0.5) N24(10.5,0.5) N25(11.5,0.5) N26(12.5,0.5) P1(-12.5,-0.5) P2(-11.5,-0.5) P3(-10.5,-0.5) P4(-9.5,-0.5) P5(-8.5,-0.5) P6(-7.5,-0.5) P7(-6.5,-0.5) P8(-5.5,-0.5) P9(-4.5,-0.5) P10(-3.5,-0.5) P11(-2.5,-0.5) P12(-1.5,-0.5) P13(-0.5,-0.5) P14(0.5,-0.5) P15(1.5,-0.5) P16(2.5,-0.5) P17(3.5,-0.5) P18(4.5,-0.5) P19(5.5,-0.5) P20(6.5,-0.5) P21(7.5,-0.5) P22(8.5,-0.5) P23(9.5,-0.5) P24(10.5,-0.5) P25(11.5,-0.5) P26(12.5,-0.5) R1(-12.5,-1.5) R2(-11.5,-1.5) R3(-10.5,-1.5) R4(-9.5,-1.5) R5(-8.5,-1.5) R6(-7.5,-1.5) R7(-6.5,-1.5) R8(-5.5,-1.5) R9(-4.5,-1.5) R10(-3.5,-1.5) R11(-2.5,-1.5) R12(-1.5,-1.5) R13(-0.5,-1.5) R14(0.5,-1.5) R15(1.5,-1.5) R16(2.5,-1.5) R17(3.5,-1.5) R18(4.5,-1.5) R19(5.5,-1.5) R20(6.5,-1.5) R21(7.5,-1.5) R22(8.5,-1.5) R23(9.5,-1.5) R24(10.5,-1.5) R25(11.5,-1.5) R26(12.5,-1.5) T1(-12.5,-2.5) T2(-11.5,-2.5) T3(-10.5,-2.5) T4(-9.5,-2.5) T5(-8.5,-2.5) T6(-7.5,-2.5) T7(-6.5,-2.5) T8(-5.5,-2.5) T9(-4.5,-2.5) T10(-3.5,-2.5) T11(-2.5,-2.5) T12(-1.5,-2.5) T13(-0.5,-2.5) T14(0.5,-2.5) T15(1.5,-2.5) T16(2.5,-2.5) T17(3.5,-2.5) T18(4.5,-2.5) T19(5.5,-2.5) T20(6.5,-2.5) T21(7.5,-2.5) T22(8.5,-2.5) T23(9.5,-2.5) T24(10.5,-2.5) T25(11.5,-2.5) T26(12.5,-2.5) U1(-12.5,-3.5) U2(-11.5,-3.5) U3(-10.5,-3.5) U4(-9.5,-3.5) U5(-8.5,-3.5) U6(-7.5,-3.5) U7(-6.5,-3.5) U8(-5.5,-3.5) U9(-4.5,-3.5) U10(-3.5,-3.5) U11(-2.5,-3.5) U12(-1.5,-3.5) U13(-0.5,-3.5) U14(0.5,-3.5) U15(1.5,-3.5) U16(2.5,-3.5) U17(3.5,-3.5) U18(4.5,-3.5) U19(5.5,-3.5) U20(6.5,-3.5) U21(7.5,-3.5) U22(8.5,-3.5) U23(9.5,-3.5) U24(10.5,-3.5) U25(11.5,-3.5) U26(12.5,-3.5) V1(-12.5,-4.5) V2(-11.5,-4.5) V3(-10.5,-4.5) V4(-9.5,-4.5) V5(-8.5,-4.5) V6(-7.5,-4.5) V7(-6.5,-4.5) V8(-5.5,-4.5) V9(-4.5,-4.5) V10(-3.5,-4.5) V11(-2.5,-4.5) V12(-1.5,-4.5) V13(-0.5,-4.5) V14(0.5,-4.5) V15(1.5,-4.5) V16(2.5,-4.5) V17(3.5,-4.5) V18(4.5,-4.5) V19(5.5,-4.5) V20(6.5,-4.5) V21(7.5,-4.5) V22(8.5,-4.5) V23(9.5,-4.5) V24(10.5,-4.5) V25(11.5,-4.5) V26(12.5,-4.5) W1(-12.5,-5.5) W2(-11.5,-5.5) W3(-10.5,-5.5) W4(-9.5,-5.5) W5(-8.5,-5.5) W6(-7.5,-5.5) W7(-6.5,-5.5) W8(-5.5,-5.5) W9(-4.5,-5.5) W10(-3.5,-5.5) W11(-2.5,-5.5) W12(-1.5,-5.5) W13(-0.5,-5.5) W14(0.5,-5.5) W15(1.5,-5.5) W16(2.5,-5.5) W17(3.5,-5.5) W18(4.5,-5.5) W19(5.5,-5.5) W20(6.5,-5.5) W21(7.5,-5.5) W22(8.5,-5.5) W23(9.5,-5.5) W24(10.5,-5.5) W25(11.5,-5.5) W26(12.5,-5.5) Y1(-12.5,-6.5) Y2(-11.5,-6.5) Y3(-10.5,-6.5) Y4(-9.5,-6.5) Y5(-8.5,-6.5) Y6(-7.5,-6.5) Y7(-6.5,-6.5) Y8(-5.5,-6.5) Y9(-4.5,-6.5) Y10(-3.5,-6.5) Y11(-2.5,-6.5) Y12(-1.5,-6.5) Y13(-0.5,-6.5) Y14(0.5,-6.5) Y15(1.5,-6.5) Y16(2.5,-6.5) Y17(3.5,-6.5) Y18(4.5,-6.5) Y19(5.5,-6.5) Y20(6.5,-6.5) Y21(7.5,-6.5) Y22(8.5,-6.5) Y23(9.5,-6.5) Y24(10.5,-6.5) Y25(11.5,-6.5) Y26(12.5,-6.5)
  silkscreen extent -14.27,-13.5 13.5,13.5, body extent -13.52,-13.5 13.48,13.5, height 2.31

## Part data
C1 C9 C10 C31 C32: library part 885012005013, "WCAP-CSGP Multilayer Ceramic Chip Capacitor, General Purpose, size 0402, NP0, 100pF, 10V", Capacitance=100pF, Capacitance Tolerance=+/-5%, Isolation Resistance  min.=10GOhm, Manufacturer="Wurth Elektronik", Operating Temperature="-55 to +125degC", Rated Voltage=10VDC, Ceramic Type=NP0, ComponentLink1Description=Manufacturer, ComponentLink1URL=http://www.we-online.de, ComponentLink2Description=Datasheet, ComponentLink2URL=https://www.we-online.com/catalog/datasheet/885012005013.pdf, Dissipation Factor max.=-, Height=0.5mm, Manufacturer Part Number=885012005013, Mounting Technology=SMT, Packaging="Tape and Reel", Published Date="April 2021", Q-Factor min.=1000, Size=0402, Technical Reference=NP00402101J010DFCT10000
C2 C11 C16 C21 C26: library part GRM155C80J475MEAAD, "Multilayer Ceramic Capacitors MLCC, size 0402, X5R, 4.7 µF, 6.3V", Capacitance="4.7 µF", Capacitance Tolerance=+/-20%, Manufacturer=Murata, Operating Temperature="-55 to +105degC", Rated Voltage=6.3VDC, Supplier Part Number 1=490-14458-1-ND, Ceramic Type=X6S, Dissipation Factor max.=10%, Height=0.5mm, Manufacturer Part Number=GRM155C80J475MEAAD, Mounting Technology=SMT, Packaging="Tape and Reel", Size=0402, Supplier 1=Digi-Key, Supplier 2=Mouser, Supplier Part Number 2=81-GRM155C80J475MEAD
C3 C4 C5 C6 C7: library part 885012105020, "WCAP-CSGP Multilayer Ceramic Chip Capacitor, General Purpose, size 0402, X5R, 10uF, 6.3V", Capacitance=10uF, Capacitance Tolerance=+/20%, Isolation Resistance  min.=0.01GOhm, Manufacturer="Wurth Elektronik", Operating Temperature="-55 to +85degC", Rated Voltage=6.3VDC, Ceramic Type=X5R, ComponentLink1Description=Manufacturer, ComponentLink1URL=http://www.we-online.de, ComponentLink2Description=Datasheet, ComponentLink2URL=https://www.we-online.com/catalog/datasheet/885012105020.pdf, Dissipation Factor max.=10%, Height=0.5mm, Manufacturer Part Number=885012105020, Mounting Technology=SMT, Packaging="Tape and Reel", Published Date="April 2021", Q-Factor min.=-, Size=0402, Technical Reference=X5R0402106M6R3DFCT10000
C8 C12 C13 C14 C15 C17 C18 C19 C20 C22 C23 C24 C25 C27 C28 C29 C30: library part 885012205018, "WCAP-CSGP Multilayer Ceramic Chip Capacitor, General Purpose, size 0402, X7R, 100nF, 10V", Capacitance=100nF, Capacitance Tolerance=+/-10%, Isolation Resistance  min.=5GOhm, Manufacturer="Wurth Elektronik", Operating Temperature="-55 to +125degC", Rated Voltage=10VDC, Ceramic Type=X7R, ComponentLink1Description=Manufacturer, ComponentLink1URL=http://www.we-online.de, ComponentLink2Description=Datasheet, ComponentLink2URL=https://www.we-online.com/catalog/datasheet/885012205018.pdf, Dissipation Factor max.=5%, Height=0.5mm, Manufacturer Part Number=885012205018, Mounting Technology=SMT, Packaging="Tape and Reel", Published Date="April 2021", Q-Factor min.=-, Size=0402, Technical Reference=X7R0402104K010DFCT10000
R1 R2: library part ERJ2RKF1002X, "General Purpose Thick Film Chip Resistors", Limiting Voltage (0402)=50, Manufacturer=Panasonic, Maximum Voltage (0402)=100, Power (0402)="0.1 W", Resistance Range (Ω)="1Ω to 100MΩ", Supplier Part Number 1=P10.0KLCT-ND, Temperature Range (ºC)="-55 to +155", AEC 200="Grade 0", ComponentLink1Description=Catalog, ComponentLink1URL=https://industrial.panasonic.com/ww/products/pt/general-purpose-chip-resistors/models?op=search&model_status_current=1&page=0#model-list-search-results, Series=ERJ, Size (0402)=2GE, Supplier 1=Digi-Key, Supplier 2=Mouser, Supplier Part Number 2=667-ERJ-2RKF1002X
R3 R18: library part ERJ2GEJ241X, "General Purpose Thick Film Chip Resistors", Limiting Voltage (0402)=50, Manufacturer=Panasonic, Maximum Voltage (0402)=100, Power (0402)="0.1 W", Resistance Range (Ω)="1Ω to 100MΩ", Supplier Part Number 1=85Y7936, Temperature Range (ºC)="-55 to +155", AEC 200="Grade 0", ComponentLink1Description=Catalog, ComponentLink1URL=https://industrial.panasonic.com/ww/products/pt/general-purpose-chip-resistors/models?op=search&model_status_current=1&page=0#model-list-search-results, Series=ERJ, Size (0402)=2GE, Supplier 1=Newark, Supplier 2=Mouser, Supplier Part Number 2=667-ERJ-2GEJ241X
R4: library part ERJ2RKF4751X, "General Purpose Thick Film Chip Resistors", Limiting Voltage (0402)=50, Manufacturer=Panasonic, Maximum Voltage (0402)=100, Power (0402)="0.1 W", Resistance Range (Ω)="1Ω to 100MΩ", Supplier Part Number 1=1065277, Temperature Range (ºC)="-55 to +155", AEC 200="Grade 0", ComponentLink1Description=Catalog, ComponentLink1URL=https://industrial.panasonic.com/ww/products/pt/general-purpose-chip-resistors/models?op=search&model_status_current=1&page=0#model-list-search-results, Series=ERJ, Size (0402)=2GE, Supplier 1=RSComponents, Supplier 2=Digi-Key, Supplier Part Number 2=P4.75KLCT-ND
R5 R6 R7: library part ERJ2RKF80R6X, "General Purpose Thick Film Chip Resistors", Limiting Voltage (0402)=50, Manufacturer=Panasonic, Maximum Voltage (0402)=100, Power (0402)="0.1 W", Resistance Range (Ω)="1Ω to 100MΩ", Supplier Part Number 1=P80.6LCT-ND, Temperature Range (ºC)="-55 to +155", AEC 200="Grade 0", ComponentLink1Description=Catalog, ComponentLink1URL=https://industrial.panasonic.com/ww/products/pt/general-purpose-chip-resistors/models?op=search&model_status_current=1&page=0#model-list-search-results, Series=ERJ, Size (0402)=2GE, Supplier 1=Digi-Key, Supplier 2=Mouser, Supplier Part Number 2=667-ERJ-2RKF80R6X
R8 R9 R10 R11 R12 R13 R14 R15 R16 R17 R19 R20 R21 R22 R23 R24 R25 R26 R27 R28 R29 R30 R31 R32: library part ERJ2RKF40R2X, "General Purpose Thick Film Chip Resistors", Limiting Voltage (0402)=50, Manufacturer=Panasonic, Maximum Voltage (0402)=100, Power (0402)="0.1 W", Resistance Range (Ω)="1Ω to 100MΩ", Supplier Part Number 1=27AC5044, Temperature Range (ºC)="-55 to +155", AEC 200="Grade 0", ComponentLink1Description=Catalog, ComponentLink1URL=https://industrial.panasonic.com/ww/products/pt/general-purpose-chip-resistors/models?op=search&model_status_current=1&page=0#model-list-search-results, Series=ERJ, Size (0402)=2GE, Supplier 1=Newark, Supplier 2=Digi-Key, Supplier Part Number 2=P40.2LCT-ND
U1 U4: "DDR3L SRAM 256Mb*16", Supplier Part Number 1=557-1792-ND, Supplier 1=Digi-Key, Supplier 2=Mouser, Supplier Part Number 2=340-265846-TRAY
U2: "3A Sink/Source DDR Termination Regulator w/ VTTREF Buffered Reference for DDR2, DDR3, DDR3L and DDR4 10-VSON -40 to 85", Operating temperature range (C)="-55ºC to 125ºC", Package=VSON-10, Rating="HiRel Enhanced Product", Supplier Part Number 1=296-23830-1-ND, Control mode="D-CAP, S4/S5", DDR memory type="DDR, DDR2, DDR3, DDR3L, LPDDR2, LPDDR3", Iout VDDQ (Max) (A)=20, Iq (Typ) (mA)=0.6, MF="Texas Instruments", MP=TPS51200DRCT, Output="VDDQ, VREF, VTT", Supplier 1=Digi-Key, Supplier 2=Mouser, Supplier Part Number 2=595-TPS51200DRCT, Vin (Max) (V)=28, Vin (Min) (V)=3
U3: "667 MHz Zynq™-7000 AP SoC, 130 PS I/O, 254 FPGA I/O, 676-Ball BGA, Speed Grade 1, Commercial Grade, Pb-Free", Generic Part Number=XC7Z030, Package=FBG676, ComponentLink1Description=Datasheet, ComponentLink1URL=http://www.xilinx.com/support/documentation/data_sheets/ds190-Zynq-7000-Overview.pdf, ComponentLink2Description="Package Specification", ComponentLink2URL=http://www.xilinx.com/support/documentation/user_guides/ug475_7Series_Pkg_Pinout.pdf, ComponentLink3Description="DC and AC Switching Characteristics", ComponentLink3URL=http://www.xilinx.com/support/documentation/data_sheets/ds191-XC7Z030-XC7Z045-data-sheet.pdf, ComponentLink4Description="Package File", ComponentLink4URL=http://www.xilinx.com/support/packagefiles/z7packages/xc7z030fbg676pkg.txt, ComponentLink5Description="Packaging and Pinout", ComponentLink5URL=http://www.xilinx.com/support/documentation/user_guides/ug865-Zynq-7000-Pkg-Pinout.pdf, ComponentLink6Description="PCB and Layout Guide", ComponentLink6URL=http://www.xilinx.com/support/documentation/user_guides/ug483_7Series_PCB.pdf, Extensible Block RAM (# 36Kb Blocks)="1060 KB (265)", Flip Flops=157200, LUTs=78600, PackageDescription="Flip-Chip Lidless BGA, Body 27 x 27 mm, 1.0 mm Pitch", PartNumber=XC7Z030-1FBG676C, RoHS=Pb-Free, Speed Grade=-1, Supplier 1=Avnet, Supplier 2=Mouser, Supplier 3=Farnell, Supplier Part Number 1=XC7Z030-1FBG676C, Supplier Part Number 2=217-XC7Z030-1FBG676C, Supplier Part Number 3=2828946

## Via types
v1: diameter 0.45, hole 0.2, Top Layer to Bottom Layer, 708 vias

## Nets (pads, with @x,y where several pads share a name; then routed paths per layer and width w, separated by ;. In a path a pad name is that pad's centre, name@x,y a point inside that pad or via, vN(x,y) a via of type N, cw(c..) or ccw(c..) an arc to the next point about the centre after c; other vN are vias at no path point)
2.5V: C2.2 U2.10
EN_PSU5: U2.7
GND: C1.1 C2.1 C3.1 C4.1 C5.1 C6.1 C7.1 C8.1 C9.1 C10.1 C11.1 C12.1 C13.1 C14.1 C15.1 C16.1 C17.1 C18.1 C19.1 C20.1 C21.1 C22.1 C23.1 C24.1 C25.1 C26.1 C27.1 C28.1 C29.1 C30.1 C31.1 C32.1 R2.1 R3.2 R4.2 R5.1 R18.2 U1.A9 U1.B1 U1.B3 U1.B9 U1.D1 U1.D8 U1.E1 U1.E2 U1.E8 U1.F9 U1.G1 U1.G8 U1.G9 U1.J2 U1.J8 U1.M1 U1.M9 U1.P1 U1.P9 U1.T1 U1.T9 U2.4 U2.8 U4.A9 U4.B1 U4.B3 U4.B9 U4.D1 U4.D8 U4.E1 U4.E2 U4.E8 U4.F9 U4.G1 U4.G8 U4.G9 U4.J2 U4.J8 U4.M1 U4.M9 U4.P1 U4.P9 U4.T1 U4.T9
NetC1_2: C1.2 R1.1 R2.2 U2.2
NetR3_1: R3.1 U1.L8
NetR5_2: R5.2 U3.W21 | length 0.7
  Top Layer w0.254: U3.W21@45.5,7.5 v1(46,8)
NetR6_2: R6.2 U3.V21 | length 0.7
  Top Layer w0.254: U3.V21@44.5,7.5 v1(45,8)
NetR18_1: R18.1 U4.L8
PS_DDR_A0: R8.1 U1.N3 U3.K22 U4.N3 | length 0.7
  Top Layer w0.251: v1(36,9) U3.K22@36.5,8.5
PS_DDR_A1: R9.1 U1.P7 U3.K20 U4.P7 | length 0.7
  Top Layer w0.251: v1(36,7) U3.K20@36.5,6.5
PS_DDR_A2: R10.1 U1.P3 U3.N21 U4.P3 | length 0.7
  Top Layer w0.251: v1(39,8) U3.N21@39.5,7.5
PS_DDR_A3: R11.1 U1.N2 U3.L22 U4.N2 | length 0.7
  Top Layer w0.251: v1(37,9) U3.L22@37.5,8.5
PS_DDR_A4: R12.1 U1.P8 U3.M20 U4.P8 | length 0.7
  Top Layer w0.251: v1(38,7) U3.M20@38.5,6.5
PS_DDR_A5: R13.1 U1.P2 U3.N22 U4.P2 | length 0.7
  Top Layer w0.251: v1(39,9) U3.N22@39.5,8.5
PS_DDR_A6: R14.1 U1.R8 U3.L20 U4.R8 | length 0.7
  Top Layer w0.251: v1(37,7) U3.L20@37.5,6.5
PS_DDR_A7: R15.1 U1.R2 U3.J21 U4.R2 | length 0.7
  Top Layer w0.251: v1(35,8) U3.J21@35.5,7.5
PS_DDR_A8: R16.1 U1.T8 U3.T20 U4.T8 | length 0.7
  Top Layer w0.251: U3.T20@42.5,6.5 v1(43,7)
PS_DDR_A9: R17.1 U1.R3 U3.U20 U4.R3 | length 0.7
  Top Layer w0.251: U3.U20@43.5,6.5 v1(44,7)
PS_DDR_A10: R19.1 U1.L7 U3.M22 U4.L7 | length 0.7
  Top Layer w0.251: v1(38,9) U3.M22@38.5,8.5
PS_DDR_A11: R20.1 U1.R7 U3.H21 U4.R7 | length 0.7
  Top Layer w0.251: v1(34,8) U3.H21@34.5,7.5
PS_DDR_A12: R21.1 U1.N7 U3.P20 U4.N7 | length 0.7
  Top Layer w0.251: U3.P20@40.5,6.5 v1(41,7)
PS_DDR_A13: R22.1 U1.T3 U3.J20 U4.T3 | length 0.7
  Top Layer w0.251: v1(35,7) U3.J20@35.5,6.5
PS_DDR_A14: R23.1 U1.T7 U3.R20 U4.T7 | length 0.7
  Top Layer w0.251: U3.R20@41.5,6.5 v1(42,7)
PS_DDR_BA0: R24.1 U1.M2 U3.U22 U4.M2 | length 0.7
  Top Layer w0.251: U3.U22@43.5,8.5 v1(44,9)
PS_DDR_BA1: R25.1 U1.N8 U3.T22 U4.N8 | length 0.7
  Top Layer w0.251: U3.T22@42.5,8.5 v1(43,9)
PS_DDR_BA2: R26.1 U1.M3 U3.R22 U4.M3 | length 0.7
  Top Layer w0.251: U3.R22@41.5,8.5 v1(42,9)
PS_DDR_CAS: R29.1 U1.K3 U3.Y23 U4.K3 | length 0.7
  Top Layer w0.251: U3.Y23@46.5,9.5 v1(47,10)
PS_DDR_CK_N: R7.2 U1.K7 U3.P21 U4.K7 | length 0.7
  Top Layer w0.175: U3.P21@40.5,7.5 v1(41,8)
PS_DDR_CK_P: R7.1 U1.J7 U3.R21 U4.J7 | length 0.7
  Top Layer w0.175: U3.R21@41.5,7.5 v1(42,8)
PS_DDR_CKE: R27.1 U1.K9 U3.U21 U4.K9 | length 0.7
  Top Layer w0.251: U3.U21@43.5,7.5 v1(44,8)
PS_DDR_CS: R28.1 U1.L2 U3.Y21 U4.L2 | length 0.7
  Top Layer w0.251: U3.Y21@46.5,7.5 v1(47,8)
PS_DDR_DM_BYTE0: U1.E7 U3.G24 | length 0.7
  Top Layer w0.251: v1(33,11) U3.G24@33.5,10.5
PS_DDR_DM_BYTE1: U1.D3 U3.K25 | length 0.7
  Top Layer w0.251: v1(36,12) U3.K25@36.5,11.5
PS_DDR_DM_BYTE2: U3.P26 U4.E7 | length 0.7
  Top Layer w0.251: U3.P26@40.5,12.5 v1(41,13)
PS_DDR_DM_BYTE3: U3.V26 U4.D3 | length 0.7
  Top Layer w0.251: U3.V26@44.5,12.5 v1(45,13)
PS_DDR_DQ0: U1.E3 U3.J26 | length 8.2
  Top Layer w0.251: v1(35,13) U3.J26@35.5,12.5 ; U1.E3@36.6,18.7 v1(37,19.1)
  Int3 (Sign) w0.242: v1(35,13) 35,13.41 35.687,14.097 35.687,17.787 v1(37,19.1)
PS_DDR_DQ1: U1.F7 U3.F25 | length 10.8
  Top Layer w0.251: v1(32,12) U3.F25@32.5,11.5 ; v1(33,19.9) U1.F7@33.4,19.5
  Int3 (Sign) w0.242: v1(32,12) 32.512,12.512 32.512,13.208 31.623,14.097 31.623,19.304 32.219,19.9 v1(33,19.9)
PS_DDR_DQ2: U1.F2 U3.J25 | length 9.5
  Top Layer w0.251: v1(35,12) U3.J25@35.5,11.5 ; U1.F2@37.4,19.5 v1(37.8,19.1)
  Int3 (Sign) w0.242: v1(35,12) 35.527,12.527 35.527,13.196 36.195,13.864 36.195,17.388 36.195,17.495 37.7,19 v1(37.8,19.1)
PS_DDR_DQ3: U1.F8 U3.G26 | length 8.6
  Top Layer w0.251: U1.F8@32.6,19.5 v1(33,19.1) ; v1(33,13) U3.G26@33.5,12.5
  Int3 (Sign) w0.242: v1(33,13) 33,13.449 34.086,14.535 34.086,18.619 33.605,19.1 v1(33,19.1)